# EAGLE board dial (EAGLE 8.3.1)
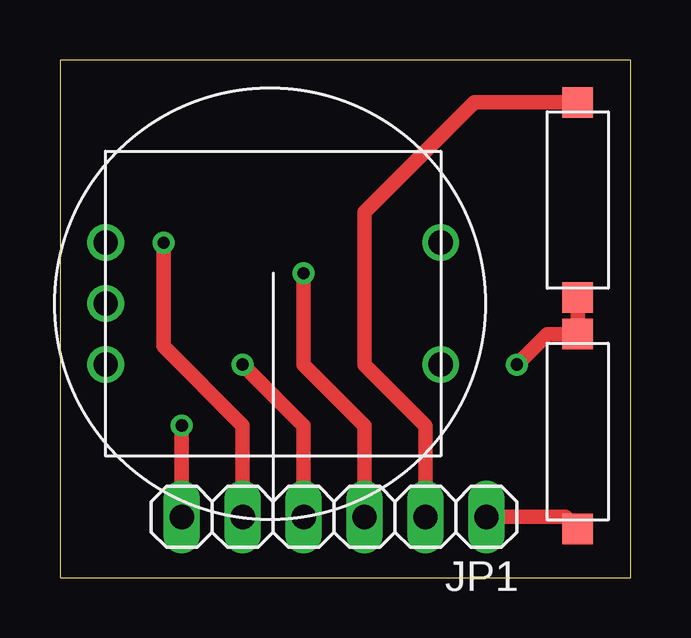
[diagram p0: board, top side]
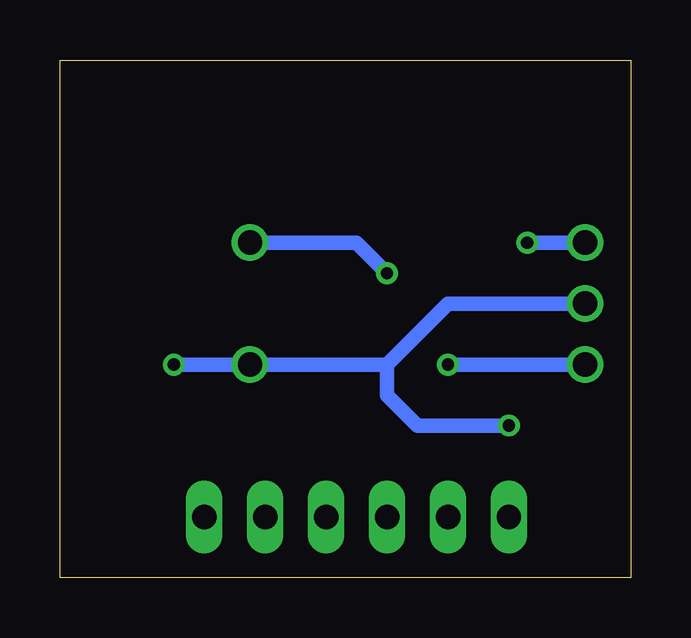
[diagram p1: board, bottom side, seen from below]

Size 23.8 x 21.58 mm. Coordinates in mm from the lower left corner, seen from the top.
Outline: 0,0 23.8,0 23.8,21.58 0,21.58 0,0
Copper layers (1*16): Top 0.035mm / dielectric 1.5mm / Bottom 0.035mm
Design rules "DRC Electronics Lab": minimum track width 16mil, minimum drill 19mil, track to track 16mil, track to pad 12mil, pad to pad 16mil, via to via 16mil, smd to smd 10mil, copper to edge 40mil, drill to drill 10mil, minimum pad ring 10mil, minimum via ring 8mil, stop-mask expansion 4mil, vias tented up to drill 0mil, thermal gap 10mil

## Footprints (pad centres in the part's own frame; a part is rotated, then mirrored left to right if it is on the bottom)
1X06 = drill 1.016 long: 1 -6.35,0; 2 -3.81,0; 3 -1.27,0; 4 1.27,0; 5 3.81,0; 6 6.35,0
ROTARY_ENCODER = drill 1.016: GND0 -6.985,3.81; GND1 6.985,1.27; PUSH -6.985,-1.27; X 6.985,3.81; Y 6.985,-1.27
MOM_SPST = smd 1.27 x 1.27: P$1 0,4.064; P$2 0,-4.064

## Placement (x,y rotation side)
JP1  [1X06]  11.43,2.54 180 top
U$3  ROTARY_ENCODER  [ROTARY_ENCODER]  8.89,12.7 180 top
U$4  MOM_SPST  [MOM_SPST]  21.59,15.75 180 top
U$5  MOM_SPST  [MOM_SPST]  21.59,6.1 0 top

## Library data of the parts
JP1 = HyTechDevices
U$3-U$5 = CH

## Nets
GND: JP1.6 U$3.GND0 U$3.GND1 U$4.P$1 U$5.P$1
NEXT: JP1.2 U$4.P$2
PREV: JP1.1 U$5.P$2
PUSH: JP1.3 U$3.PUSH
X: JP1.4 U$3.X
Y: JP1.5 U$3.Y

## Tracks (layer width: path | path; a pad name or v marks a point on that pad's centre or on a via)
GND  (via drill 0.51)
  Top 0.61: U$4.P$1 U$5.P$1 20.32,10.16 v19.05,8.89 | v5.08,6.35 JP1.6
  Bottom 0.61: 10.16,8.89 U$3.GND0 v19.05,8.89 | 10.16,8.89 7.62,11.43 U$3.GND1 | 10.16,8.89 10.16,7.62 8.89,6.35 v5.08,6.35
NEXT
  Top 0.61: U$4.P$2 17.27,19.81 12.7,15.24 12.7,8.89 15.24,6.35 JP1.2
PREV
  Top 0.61: JP1.1 21.08,2.54 U$5.P$2
PUSH  (via drill 0.51)
  Top 0.61: JP1.3 12.7,6.35 10.16,8.89 v10.16,12.7
  Bottom 0.61: v10.16,12.7 11.43,13.97 U$3.PUSH
X  (via drill 0.51)
  Top 0.61: JP1.4 10.16,6.35 v7.62,8.89
  Bottom 0.61: U$3.X v7.62,8.89
Y  (via drill 0.51)
  Top 0.61: v4.32,13.97 4.32,9.65 7.62,6.35 JP1.5
  Bottom 0.61: v4.32,13.97 U$3.Y